# Altium PCB CW308T_EFR32MG21_SOCKET.PcbDoc
Units mil, origin at the board's own origin, x right, y up, seen from the top; angles counter-clockwise.
Board outline 2057 x 2536 mil, 2 copper layers (Top Layer, Bottom Layer); 18 components, 23 nets, 133 pads, 59 vias.
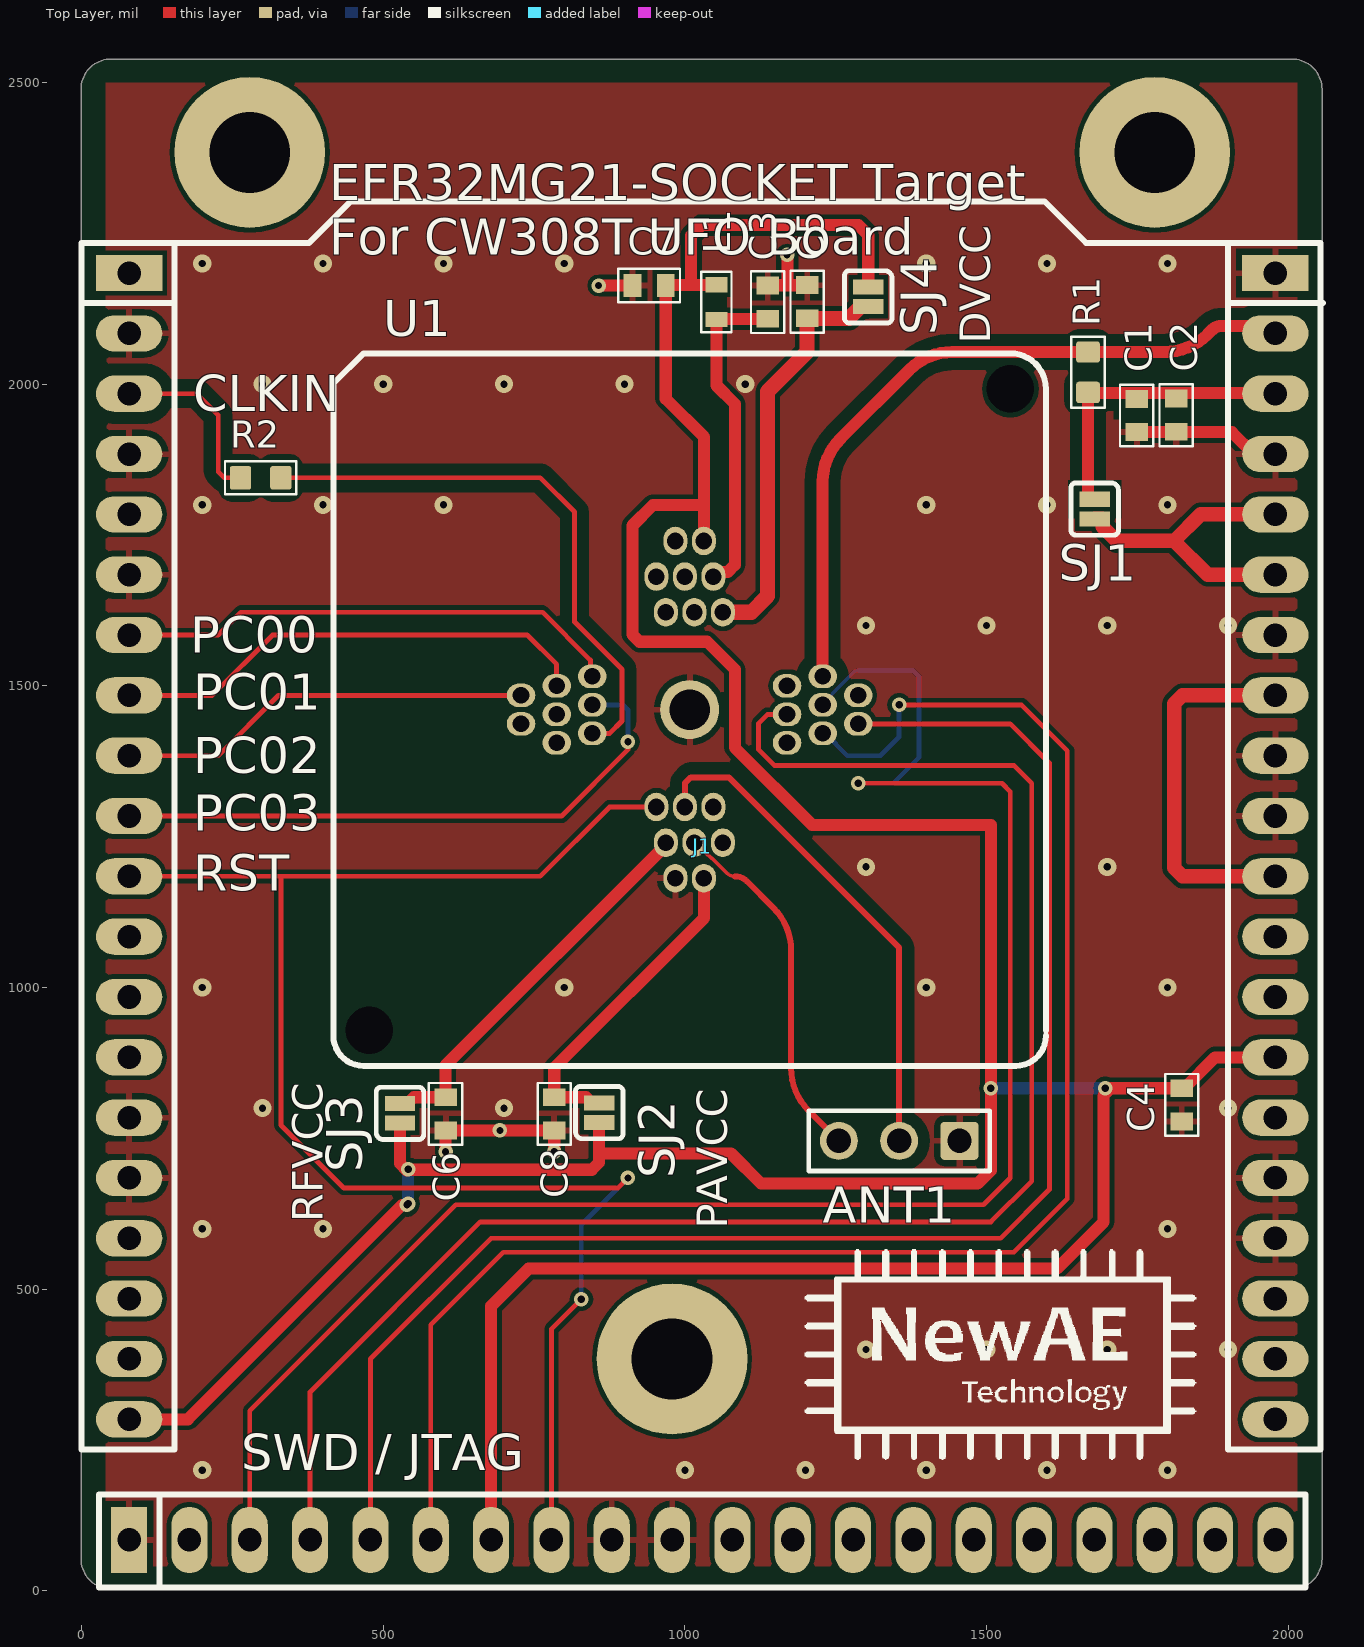
[diagram p0: Top Layer view]
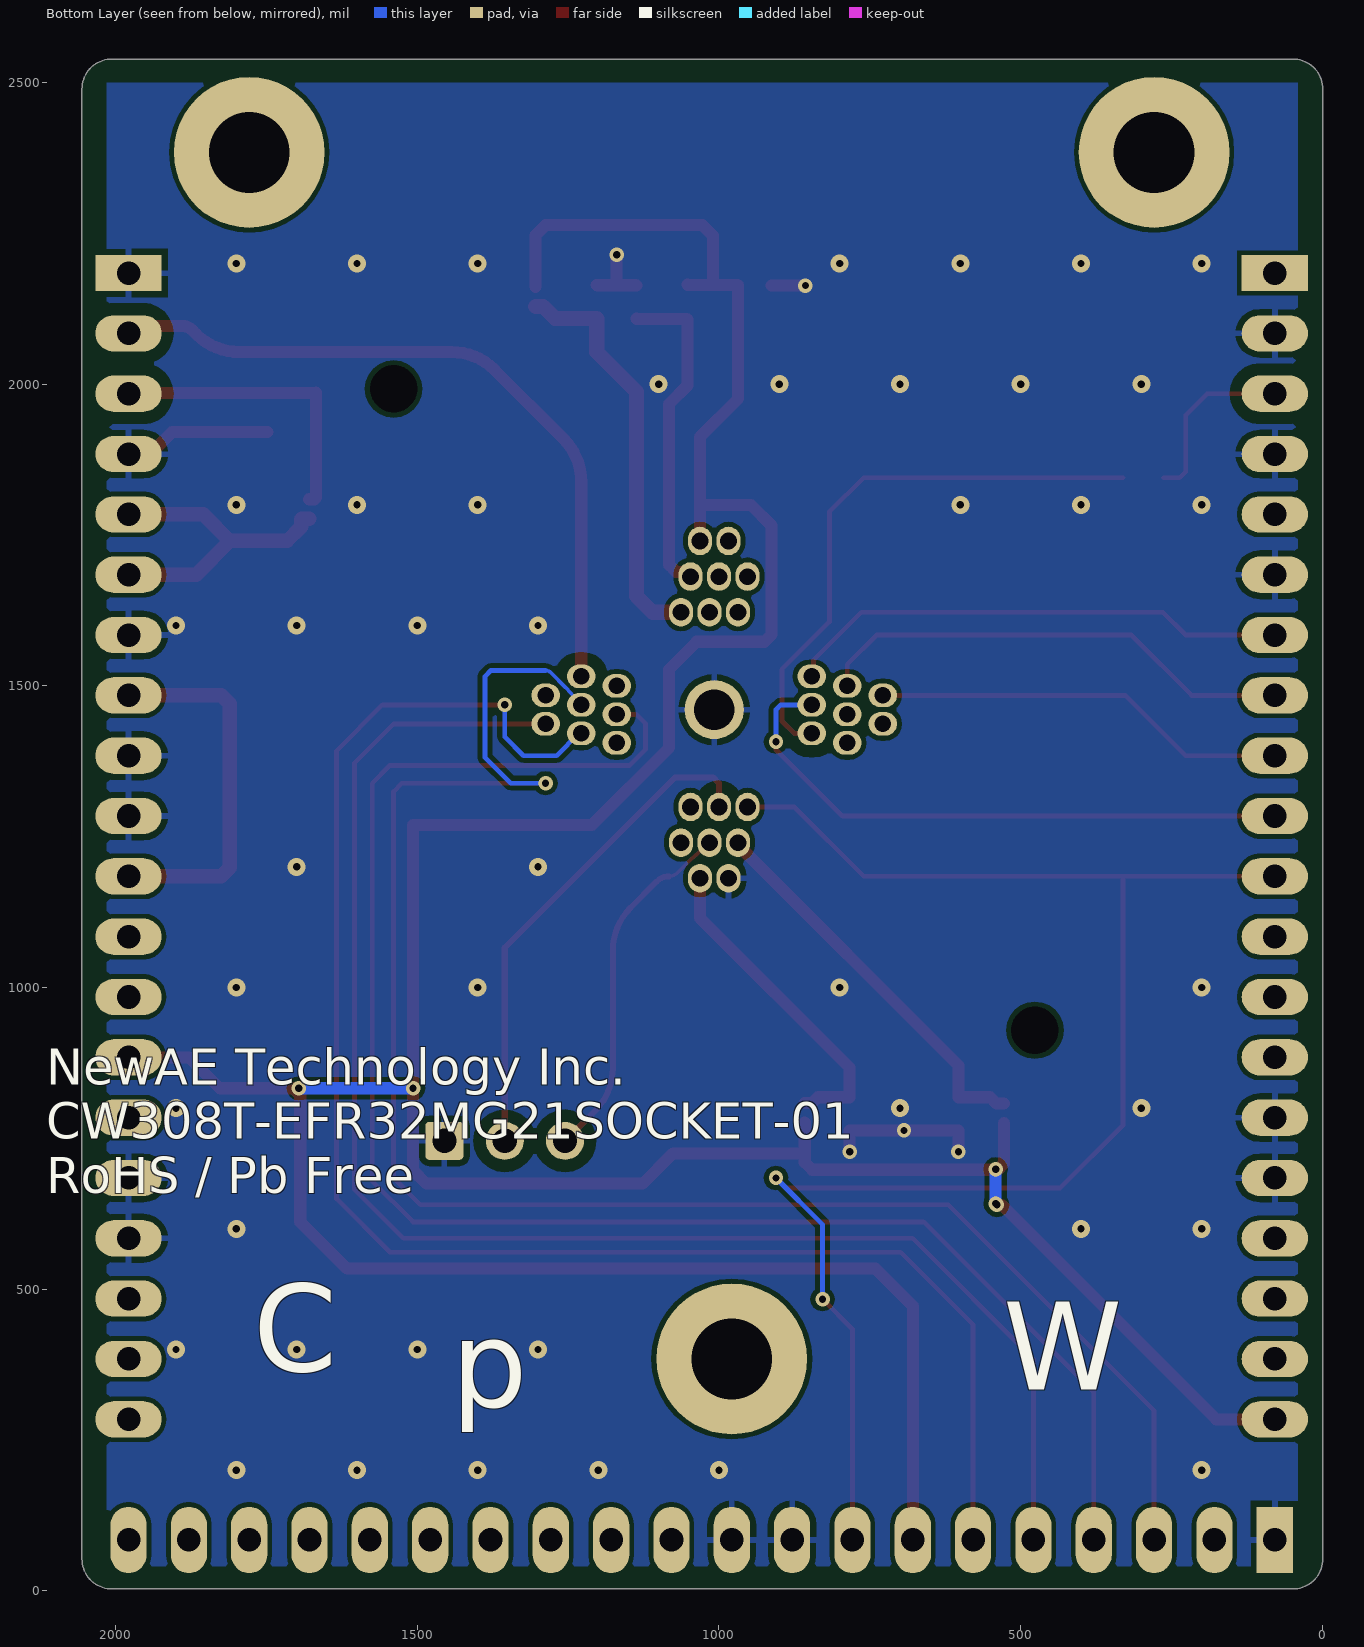
[diagram p1: Bottom Layer view, seen from below]

## Layer stack, top to bottom
Top Solder: solder mask 0.4, Solder Resist, Dk 3.5
Top Layer: signal copper 1.4
Dielectric 1: dielectric 12.6, FR-4, Dk 4.8
Bottom Layer: signal copper 1.4
Bottom Solder: solder mask 0.4, Solder Resist, Dk 3.5

## Board outline
-1,53 -1,2489 cw(c49,2489) 49,2539 2006,2539 cw(c2006,2489) 2056,2489 2056,53 cw(c2006,53) 2006,3 49,3 cw(c49,53)

## Design rules (kind name [scope] priority, off if disabled: settings)
BoardOutlineClearance Silk_to_Outline [(OnLayer('Top Overlay'))] p1: gap=0 ignorepadtopadclearanceinfootprint=FALSE
BoardOutlineClearance [All] p2: gap=40 ignorepadtopadclearanceinfootprint=FALSE
Clearance Clearance_1 [InNetClass('MORESPACE')] p1: gap=6 ignorepadtopadclearanceinfootprint=FALSE except(0: Arc-Hole Track-Hole SMDPad-Hole THPad-Hole Via-Hole Fill-Hole Poly-Hole Region-Hole Text-Hole; 20: Arc-Fill Arc-Poly Arc-Region Track-Fill Track-Poly Track-Region SMDPad-Fill SMDPad-Poly SMDPad-Region THPad-Fill THPad-Poly THPad-Region Via-Fill Via-Poly Via-Region Fill-Fill Fill-Poly Fill-Region Poly-Poly Poly-Region Region-Region)
Clearance [All] p2: gap=6 ignorepadtopadclearanceinfootprint=FALSE except(0: Arc-Hole Track-Hole SMDPad-Hole THPad-Hole Via-Hole Fill-Hole Poly-Hole Region-Hole Text-Hole)
HoleSize [All] p1: absolutevalues=TRUE maxlimit=200 minlimit=1 maxpercent=80.000 minpercent=20.000
MinimumSolderMaskSliver [All] p1: minsoldermaskwidth=5
PlaneConnect PlaneConnect_viaDirect [IsVia] p1: planeconnectstyle=Direct reliefexpansion=20 reliefentries=4 reliefconductorwidth=10 reliefairgap=10
PlaneConnect [All] p2: planeconnectstyle=Relief reliefexpansion=20 reliefentries=4 reliefconductorwidth=10 reliefairgap=10
PolygonConnect PolygonConnect_viaDirect [All vs isVia] p1: connectstyle=Direct reliefconductorwidth=10 reliefentries=4 polygonreliefangle="90 Angle" airgapwidth=10
PolygonConnect [All] p2: connectstyle=Relief reliefconductorwidth=10 reliefentries=4 polygonreliefangle="90 Angle" airgapwidth=10
RoutingVias [All] p1: holewidth=28 width=50 viastyle="Through Hole" minholewidth=28 minwidth=50 maxholewidth=28 maxwidth=50 useviatemplates=TRUE viatemplateguid#1={1A3752DF-5185-4C8F-B12F-78C2E36E3B79} viatemplateguid#2={10C6E2E2-26C8-43AE-A37D-40FB085232FA} viatemplateguid#3={3CB7D92B-ADEE-4C2B-B6B5-F2CE337C13DB} viatemplatename#1=v61h30m0mx0 viatemplatename#2=v86h41m0mx0 viatemplatename#3=v127h71m0mx0
SilkToSilkClearance [All] p1: silktosilkclearance=5
SilkToSolderMaskClearance [IsPad] p1: minsilkscreentomaskgap=5 clearancetoexposedcopper=TRUE
SolderMaskExpansion [All] p1: expansion=4 istentingtop=FALSE
Width [All] p1: maxlimit=100 minlimit=6 preferedwidth=8 minimp=50.000000 maximp=50.000000 favimp=50.000000
25 further rules are at their usual default settings.

## Classes and differential pairs
net class MORESPACE: CLKIN NetANT1_2 NetANT1_3 NetJ1_A3 SHUNTH SHUNTL

## Components (designator, comment, footprint, x,y, rotation, side; value= is the part's Value field where it differs from the comment)
ANT1 "Straight Header Pins" 1x3_Straight_pins 1355.11,745.83 r270 top
C1 "100n" CAPC0603_M 1748.79,1948.1 r270 top
C2 "2u2" CAPC0603_M 1814.23,1948.58 r270 top
C3 "100n" CAPC0603_M 1137.04,2136.04 r90 top
C4 "100n" CAPC0603_M 1823.5,805.42 r270 top
C5 "100n" CAPC0603_M 1202.58,2136.75 r90 top
C6 "100n" CAPC0603_M 603.22,790.57 r270 top
C7 "100n" CAPC0603_M 940.69,2163.57 r180 top
C8 "100n" CAPC0603_M 783.43,790.57 r270 top
J1 "CW308_TARGETCON" CW308_TBOARD_CONN 78.74,2184.25 r0 top locked
L1 "1k @ 1Mhz" IND_0603 1052.23,2136.08 r270 top
R1 "22R" RESC1608X55N 1668.22,2019.84 r270 top
R2 "22R" RESC1608X55N 296.77,1844.88 r180 top
SJ1 "NC" SJ_2S_NC 1679.25,1793.11 r270 top
SJ2 "NC" SJ_2S_NC 857.9,792.53 r90 top
SJ3 "NC" SJ_2S_NC 527.56,791.33 r90 top
SJ4 "NC" SJ_2S_NC 1303.9,2144.83 r270 top
U1 "EFR32MG21A020F1024IM32-BR" socket-QFN32-790-62032-101 1007.87,1460.63 r0 top

## Footprints (in the part's own frame and the unit in brackets; to place one, negate y for a bottom-side part, rotate by r counter-clockwise, add the part's x,y. Pads: shape width x height; smd on the part's side, far side on the other; paste and mask are expansions set on the pad)
1x3_Straight_pins [mm]
  rrect20% 1.6x1.6 hole 1.02: 1(0,2.54)
  round 1.6 hole 1.02: 2(0,0) 3(0,-2.54)
  silkscreen extent -1.27,-3.81 1.27,3.81, body extent -1.27,-3.81 1.27,3.81, height 8.57
CAPC0603_M [mm]
  rect 0.75x0.95 smd: 1(-0.7,0) 2(0.7,0)
  silkscreen extent -1.3,-0.7 1.3,0.7, body extent -0.85,-0.45 0.85,0.45, height 0.9
CW308_TBOARD_CONN [mil]
  rect 110x60 hole 39: A1(0,0) C1(1900,0)
  oval 110x60 hole 39: A2(0,-100) A3(0,-200) A4(0,-300) A5(0,-400) A6(0,-500) A7(0,-600) A8(0,-700) A9(0,-800) A10(0,-900) A11(0,-1000) A12(0,-1100) A13(0,-1200) A14(0,-1300) A15(0,-1400) A16(0,-1500) A17(0,-1600) A18(0,-1700) A19(0,-1800) A20(0,-1900) C2(1900,-100) C3(1900,-200) C4(1900,-300) C5(1900,-400) C6(1900,-500) C7(1900,-600) C8(1900,-700) C9(1900,-800) C10(1900,-900) C11(1900,-1000) C12(1900,-1100) C13(1900,-1200) C14(1900,-1300) C15(1900,-1400) C16(1900,-1500) C17(1900,-1600) C18(1900,-1700) C19(1900,-1800) C20(1900,-1900)
  rect 60x110 hole 39: B1(0,-2100)
  oval 60x110 hole 39: B2(100,-2100) B3(200,-2100) B4(300,-2100) B5(400,-2100) B6(500,-2100) B7(600,-2100) B8(700,-2100) B9(800,-2100) B10(900,-2100) B11(1000,-2100) B12(1100,-2100) B13(1200,-2100) B14(1300,-2100) B15(1400,-2100) B16(1500,-2100) B17(1600,-2100) B18(1700,-2100) B19(1800,-2100) B20(1900,-2100)
  round 250 hole 134: MH1(200,200) MH2(900,-1800) MH2(1700,200)
  silkscreen extent -79,-2179 1979,50, body extent -50,-2149 1950,50, height 48
IND_0603 [mm] "Chip Inductor, 2-Leads, Body 1.60x0.80mm, IPC Medium Density"
  rect 0.64x0.92 smd: 1(-0.73,0) 2(0.73,0)
  Top Layer pour cut-out: -0.686,0.457 0.838,0.457 0.838,-0.457 -0.686,-0.457
  silkscreen extent -1.27,-0.64 1.27,0.64, body extent -0.82,-0.43 0.82,0.43, height 0.9
RESC1608X55N [mm] "Chip Resistor, Body 1.6x0.8mm, EIA 0603, IPC Medium Density"
  round 0.254 on Mech15: 0(0,0)
  rrect25% 0.9x1 smd: 1(-0.85,0) 2(0.85,0)
  Top Layer pour cut-out: -0.6,0.5 0.6,0.5 0.6,-0.5 -0.6,-0.5
  silkscreen extent -1.5,-0.7 1.5,0.7, body extent -0.87,-0.47 0.88,0.48, height 0.54
SJ_2S_NC [mil] "Solder Jumper, closed with solder paste"
  rect 25x50 smd: 1(-16.22,0) 2(16.22,0)
  silkscreen extent -43,-39 43,39
socket-QFN32-790-62032-101 [mm]
  oval 1.2x1 hole 0.7: 1(-4.1,1.4) 2(-5.6,1) 3(-7.1,0.6) 4(-4.1,0.2) 5(-5.6,-0.2) 6(-7.1,-0.6) 7(-4.1,-1) 8(-5.6,-1.4) 17(4.1,-1.4) 18(5.6,-1) 19(7.1,-0.6) 20(4.1,-0.2) 21(5.6,0.2) 22(7.1,0.6) 23(4.1,1) 24(5.6,1.4)
  oval 1x1.2 hole 0.7: 8(-1.4,5.6) 9(-1.4,-4.1) 10(-1,-5.6) 11(-0.6,-7.1) 12(-0.2,-4.1) 13(0.2,-5.6) 14(0.6,-7.1) 15(1,-4.1) 16(1.4,-5.6) 25(1.4,4.1) 26(1,5.6) 27(0.6,7.1) 28(0.2,4.1) 29(-0.2,5.6) 30(-0.6,7.1) 31(-1,4.1)
  round 2.489 hole 1.7: 33(0,0)
  round 0 hole 2 unplated: MH1(-13.5,-13.5) MH1(13.5,13.5)
  silkscreen extent -15,-15 15,15

## Part data
ANT1: library part HDR_3PIN, "1x3 Straight pin header", Manufacture 1="Wurth Electronics Inc.", Manufacture Part Number 1=61300311121, Supplier Part Number 1=732-5316-ND, Component Group=Connector, Component Type=Standard, Mounting Technology=Through-hole, Part Number=HDR_3PIN, Pin Count=3, PP Material Stack=0, PP Rotation=0, RoHS=Yes, Supplier 1=Digi-Key
C1 C3 C4 C5 C6 C7 C8: library part CCHIP-100n-0603, "100n, 0603", Case-EIA=0603, Case-Metric=1608, Manufacture 1=Kemet, Manufacture Part Number 1=C0603C104K5RACTU, Rated Voltage=50VDC, Supplier Part Number 1=399-5089-2-ND, Component Group=Capacitor, Component Type=Standard, Mounting Technology=SMT, Part Number=CCHIP-100n-0603, Pin Count=2, Supplier 1=Digi-Key
C2: library part CCHIP-2u2-0603, "2u2, 0603", Case-EIA=0603, Case-Metric=1608, Manufacture 1=Samsung, Manufacture Part Number 1=CL10B225KP8NNNC, Rated Voltage=10VDC, Supplier Part Number 1=1276-1134-2-ND, Component Group=Capacitor, Component Type=Standard, Mounting Technology=SMT, Part Number=CCHIP-2u2-0603, Pin Count=2, Supplier 1=Digi-Key
J1: library part CW308_TBOARD, "CW308 \"Standard\" Target Board Connector", Component Group=Mechanical, Component Type=Standard, Mounting Technology=Through-hole, Part Number=CW308_TBOARD, Pin Count=60, Pitch=2.54mm
L1: library part FBCHIP-1k-0603, "Ferrite Beads HI CUR CHIP BD 0603 1000OHMS 25%", Manufacture 1="Taiyo Yuden", Manufacture Part Number 1="FBMH1608HM102-T / FBMH1608HM102-T / FBMH1608HM102-T / FBMH1608HM102-T", Supplier Part Number 1=963-FBMH1608HM102-T, Component Group=Inductor, Component Type=Standard, Mounting Technology=SMT, Part Number=FBCHIP-1k-0603, Pin Count=2, PP Material Stack=0, PP Rotation=0, RoHS=Yes, Supplier 1=Mouser
R1 R2: library part RCHIP-22R-0603, "22R res, 0603, 1%, 1/10W", Case-EIA=0603, Case-Metric=1608, Manufacture 1=Yageo, Manufacture Part Number 1=RC0603FR-0722RL, Rated Power=0.1W, Rated Voltage=75VDC, Supplier Part Number 1=311-22.0HRCT-ND, Temperature Range="-55C to 155C", Tolerance=1%, Component Group=Resistor, Component Type=Standard, Mounting Technology=SMT, Part Number=RCHIP-22R-0603, Pin Count=2, Supplier 1=Digi-Key
SJ1 SJ2 SJ3 SJ4: library part SJ_2S, "Solder Jumper, NC", Component Group="PCB Feature", Component Type="Standard (No BOM)", Mounting Technology=COPPER, Part Number=SJ_2S, Pin Count=2
U1: library part CMP-08085-000003-1, "IC MCU 2.4G 20DB MULTIPROTOCOL", Ambient Temperature Range High=+125°C, Ambient Temperature Range Low=-40°C, Frequency=80MHz, Manufacturer="Silicon Labs", Max Junction Temp=+135°C, Max Supply Voltage=3.8V, Min Supply Voltage=1.71V, Package=0, Temperature="to +135°C", Automotive=No, Category=IC, ComponentLink2Description=Datasheet, ComponentLink2URL=https://www.silabs.com/documents/public/data-sheets/efr32mg21-datasheet.pdf, Core Architecture="ARM Cortex-M33", Data Bus Width=32bits, Device Class L1="Integrated Circuits (ICs)", Device Class L2="Embedded Processors and Controllers", Device Class L3=Microcontrollers, Digikey Description="IC MCU 2.4G 20DB MULTIPROTOCOL", Height=0.9mm, Interface=I2C,SPI,UART,USART,IrDA,I2S,SMBus,RS-485,Other, Ipc Land Pattern Name=QFN40P400X400X85-32, Lead Free=Yes, Manufacturer Part Number=EFR32MG21A020F1024IM32-BR, Memory Size=1024KBytes, Memory Type=FLASH, Number Of A/D Converters=1, Number Of Adc Channels=1, Number Of Cores=1, Number Of I2C Channels=2, Number Of I/Os=20, Number Of Pwm Channels=6, Number Of Spi Channels=3, Number Of Timers/Counters=5, Number Of Uart Channels=3, Octopart=https://octopart.com/efr32mg21a020f1024im32-br-silicon+labs-98975230, Ram Size=96KBytes, RoHS=TRUE, Standoff Height=0mm, Temperature Range High=+135°C

## Via types
v1: diameter 30, hole 12, Top Layer to Bottom Layer, tented both sides, 44 vias
v2: diameter 24, hole 12, Top Layer to Bottom Layer, tented both sides, 15 vias

## Nets (pads, with @x,y where several pads share a name; then routed paths per layer and width w, separated by ;. In a path a pad name is that pad's centre, name@x,y a point inside that pad or via, vN(x,y) a via of type N, cw(c..) or ccw(c..) an arc to the next point about the centre after c; other vN are vias at no path point)
+3v3: C4.1 C7.1 J1.A20 J1.B7 J1.C14 L1.1 SJ2.1 SJ3.1 SJ4.1 U1.27 | length 6686.2
  Top Layer w20: J1.A20 175.98,284.25 531.5,639.76 v2(539.28,639.76) ; SJ3.1 527.56,708.47 v2@539.28,696.75 ; v2(541.34,698.82) 542.1,698.05 544.93,698.05 545.09,697.9 845.54,697.9 857.9,710.26 857.9,724.75 ; J1.B7 678.74,472.05 740.69,534 1616.68,534 1694.1,611.42 1694.1,821.27 1705.82,832.98 C4.1 1827.44,832.98 1878.71,884.25 J1.C14 ; SJ2.1 857.9,724.75 ; U1.27 1031.49,1799.48 ; L1.1 1051.61,2164.19 1010.24,2164.19 ; SJ4.1 1303.9,2247.28 1287.39,2263.78 1027.55,2263.78 1010.24,2246.47 1010.24,2164.19 ; 857.9,724.75 1076.43,724.75 1126.43,674.75 1485.09,674.75 1507.09,696.75 v2(1507.09,832.98) 1507.09,1269.68 1210.63,1269.68 1082.68,1397.64 1082.68,1527.29 1036.87,1573.09 924.69,1573.09 912.97,1584.81 912.97,1765.7 946.76,1799.48 1031.49,1799.48 ; 1010.24,2164.19 968.88,2164.19 C7.1 968.25,1975.9 1031.49,1912.67 1031.49,1799.48
  Bottom Layer w20: v2(539.28,639.76) v2(541.34,641.83) v2(541.34,698.82) ; v2(1507.09,832.98) v2(1696.55,832.98)
CLKIN: R2.1 U1.7 | length 947
  Top Layer w8: R2.1 760.27,1844.88 816.93,1788.23 816.93,1606.01 895.67,1527.27 895.67,1441.69 875.23,1421.26 U1.7
FILT: J1.C5 J1.C6 SJ1.2 | length 531.5
  Top Layer w24: SJ1.2 1691.75,1776.89 1692.25,1776.39 1692.25,1763.89 1715.99,1740.15 1810.7,1740.15 ; J1.C6 1866.6,1684.25 1810.7,1740.15 ; J1.C5 1854.79,1784.25 1810.7,1740.15
GND: ANT1.1 C1.2 C2.2 C3.2 C4.2 C5.2 C6.2 C7.2 C8.2 J1.A2 J1.A4 J1.A6 J1.A15 J1.A16 J1.B1 J1.B9 J1.B10 J1.C1 J1.C4 J1.C7 J1.C9 J1.C10 J1.C16 J1.C17 U1.11 U1.33 | length 668.8
  Top Layer w20: v2(603.22,727.7) C6.2 v2(693.33,763.01) C8.2 v2(783.43,727.7) ; v2(856.79,2163.57) C7.2 ; C3.2 1137.4,2163.96 1169.81,2163.96 ; v2(1169.28,2214.57) 1169.81,2214.04 1169.81,2163.96 ; C5.2 1202.23,2163.96 1169.81,2163.96 ; C1.2 1906.63,1920.54 1942.92,1884.25 J1.C4
  other v1: 200,200 1000,200 1200,200 1400,200 1600,200 1800,200 1300,400 1500,400 1700,400 1900,400 200,600 400,600 1800,600 300,800 700,800 1900,800 200,1000 800,1000 1400,1000 1800,1000 1300,1200 1700,1200 1300,1600 1500,1600 1700,1600 1900,1600 200,1800 400,1800 600,1800 1400,1800 1600,1800 1800.03,1800.03 300,2000 500,2000 700,2000 900,2000 1100,2000 200,2200 400,2200 600,2200 800,2200 1400,2200 1600,2200 1800,2200
GPIO1: J1.A7 U1.1 | length 841.4
  Top Layer w8: J1.A7 226.38,1584.25 264.17,1622.04 764.14,1622.04 843.44,1542.74 843.44,1518.76 U1.1
GPIO2: J1.A8 U1.2 | length 805.7
  Top Layer w8: J1.A8 216.54,1484.25 316.54,1584.25 738.58,1584.25 787.39,1535.44 U1.2
GPIO3: J1.A9 U1.3 | length 691
  Top Layer w8: J1.A9 226.38,1384.25 326.38,1484.25 U1.3
GPIO4: J1.A10 U1.4 | length 1001.1
  Top Layer w8: J1.A10 795.67,1284.25 905.51,1394.09 v2(905.51,1407.48)
  Bottom Layer w8: U1.4 897.64,1468.5 905.51,1460.63 v2(905.51,1407.48)
NetANT1_2: ANT1.2 U1.12 | length 835.8
  Top Layer w10: U1.12 999.99,1338.58 1009.84,1348.43 1072.83,1348.43 1355.11,1066.15 ANT1.2
NetANT1_3: ANT1.3 U1.13 | length 595.4
  Top Layer w6: U1.13 1043.79,1214.9 ccw(c1062.99,1236.22) 1045.94,1213.15 1069.29,1189.8 ccw(c1082.68,1203.19) 1082.68,1184.25
  Top Layer w10: 1082.68,1184.25 cw(c1082.68,1155.65) 1102.9,1175.87 1146.71,1132.07 cw(c1075.99,1061.36) 1175.99,1061.36 1175.99,866.37 ccw(c1275.99,866.37) 1205.28,795.66 ANT1.3
NetC3_1: C3.1 L1.2 U1.26 | length 547.4
  Top Layer w20: U1.26 1054.88,1688.74 1070.96,1688.74 1082.68,1700.46 1082.68,1967.35 1052.23,1997.8 L1.2@1052.23,2106.52 ; L1.2 1052.81,2107.91 1136.47,2107.91 C3.1
NetC5_1: C5.1 SJ4.2 U1.25 | length 682
  Top Layer w25: U1.25 1110.23,1622.04 1137.04,1648.86 1137.04,1987.77 1202.58,2053.31 C5.1 1271.97,2109.19 1291.4,2128.62 SJ4.2
NetC6_1: C6.1 SJ3.2 U1.10 | length 653.4
  Top Layer w20: SJ3.2 540.06,807.55 550.64,818.13 C6.1 603.22,870.94 968.5,1236.22 U1.10
NetC8_1: C8.1 SJ2.2 U1.14 | length 544.1
  Top Layer w20: SJ2.2 845.4,808.74 836.02,818.13 C8.1 783.43,866.98 1031.49,1115.04 U1.14
NetJ1_A3: J1.A3 R2.2 | length 297.4
  Top Layer w8: J1.A3 190.94,1984.25 226.38,1948.82 226.38,1854.72 236.22,1844.88 R2.2
NetJ1_C8: J1.C8 J1.C11 | length 619.6
  Top Layer w24: J1.C11 1824.76,1184.25 1810.7,1198.31 1810.7,1470.19 1824.76,1484.25 J1.C8
RST: J1.A11 J1.B8 U1.9 | length 2615.7
  Top Layer w8: J1.A11 330.24,1184.25 ; J1.B8 783.43,88.94 778.74,93.64 778.74,433.76 v2(828.29,483.32) ; v2(905.51,684.25) 905.17,684.25 888.37,667.45 434.91,667.45 330.24,772.13 330.24,1184.25 ; U1.9 875.23,1299.21 760.27,1184.25 330.24,1184.25
  Bottom Layer w8: v2(828.29,483.32) 828.29,607.03 v2(905.51,684.25)
SHUNTH: C1.1 C2.1 J1.C3 R1.2 SJ1.1 | length 498
  Top Layer w20: SJ1.1 1670.72,1809.33 1668.22,1811.83 R1.2 1669.28,1985.32 1977.68,1985.32 J1.C3
SHUNTL: J1.C2 R1.1 U1.24 | length 1193.7
  Top Layer w20: U1.24 1228.34,1838.65 cw(c1328.34,1838.65) 1257.63,1909.36 1372.29,2024.02 cw(c1443,1953.31) 1443,2053.31 R1.1 1795.35,2053.31 ccw(c1795.35,2153.31) 1866.06,2082.6 1872.96,2089.5 cw(c1889.76,2072.69) 1889.76,2096.46 1949.28,2096.46 cw(c1949.28,2054.79) J1.C2
SWCLK: J1.B6 U1.18 | length 2759.5
  Top Layer w8: J1.B6 578.74,440.94 698.82,561.02 1545.28,561.02 1633.86,649.61 1633.86,1392.48 1557.84,1468.5 v2(1355.11,1468.5)
  Bottom Layer w8: U1.18 1232.28,1421.26 1269.28,1384.25 1324.01,1384.25 1355.11,1415.35 v2(1355.11,1468.5)
SWDIO: J1.B5 U1.19 | length 2592.6
  Top Layer w8: J1.B5 478.74,384.25 678.74,584.25 1523.23,584.25 1604.33,665.35 1604.33,1372.04 1539.37,1437.01 U1.19
TDI: J1.B3 U1.21 | length 2973.1
  Top Layer w8: J1.B3 278.74,298.43 620.08,639.76 1494.88,639.76 1539.36,684.24 1539.36,1324.81 1525.59,1338.58 v2(1287.39,1338.58)
  Bottom Layer w6: U1.21 1253.59,1496.55 ccw(c1232.28,1515.75) 1254.27,1497.33 1279.09,1522.15 cw(c1287.39,1513.84) 1287.39,1525.59
  Bottom Layer w8: v2(1287.39,1338.58) 1345.27,1338.58 1387.8,1381.11 1387.8,1515.75 1377.95,1525.59 1287.39,1525.59
TDO: J1.B4 U1.20 | length 2818.5
  Top Layer w8: J1.B4 378.74,329.53 660.64,611.42 1507.09,611.42 1574.8,679.13 1574.8,1338.58 1545.28,1368.11 1148.03,1368.11 1122.05,1394.09 1122.05,1437.76 1137.04,1452.75 U1.20
pads on no net: J1.A1 J1.A5 J1.A12 J1.A13 J1.A14 J1.A17 J1.A18 J1.A19 J1.B2 J1.B11 J1.B12 J1.B13 J1.B14 J1.B15 J1.B16 J1.B17 J1.B18 J1.B19 J1.B20 J1.C12 J1.C13 J1.C15 J1.C18 J1.C19 J1.C20 J1.MH1 J1.MH2 R1.0 R2.0 U1.5 U1.6 U1.8 U1.15 U1.16 U1.17 U1.22 U1.23 U1.28 U1.29 U1.30 U1.31 U1.MH1

## Polygon pours and split planes (outlines as drawn)
GND on Bottom Layer "GND_L02_P002" (solid, remove dead copper, pour order 2): 0,2539.37 2047.24,2539.37 2047.24,0 0,0
GND on Top Layer "GND_L01_P003" (solid, remove dead copper, pour order 3): 29.53,2529.53 39.37,2519.68 2027.56,2519.68 2027.56,0 1938.98,-88.58 -9.84,-88.58

## Silkscreen, mask and mechanical layers (free items; w line width, h text height)
Top Overlay:
  drawing of 21 lines, arcs and shapes, not listed
  text "EFR32MG21-SOCKET Target / For CW308T UFO Board" at 410.31,2214.57 h60
  text "DVCC" at 1505.91,2066.93 h50 r90
  text "CLKIN" at 185,1955 h60
  text "PC00" at 180,1555 h60
  text "PC01" at 185,1460 h60
  text "PC02" at 185,1355 h60
  text "PC03" at 185,1260 h60
  text "RST" at 185,1160 h60
  text "RFVCC" at 400,611.21 h50 r90
  text "PAVCC" at 1069.84,600 h50 r90
  text "SWD / JTAG" at 265,200 h60
Bottom Overlay:
  text "NewAE Technology Inc. / CW308T-EFR32MG21SOCKET-01 / RoHS / Pb Free" at 2116,659 h60
  text "C" at 1771.65,314.96 h250
  text "W" at 528.72,285.43 h250
  text "p" at 1443.51,255.91 h250
Mechanical 1:
  lines w20: -1,53 ccw(c49,53) 49,3 2006,3 ccw(c2006,53) 2056,53 2056,2489 ccw(c2006,2489) 2006,2539 198,2539 49,2539 ccw(c49,2489) -1,2489 -1,53